# Altium PCB Boost_Shield.PcbDoc
Units mil, origin at the board's own origin, x right, y up, seen from the top; angles counter-clockwise.
Board outline 3000 x 2000 mil, 2 copper layers (Top Layer, Bottom Layer); 29 components, 16 nets, 81 pads, 7 vias.
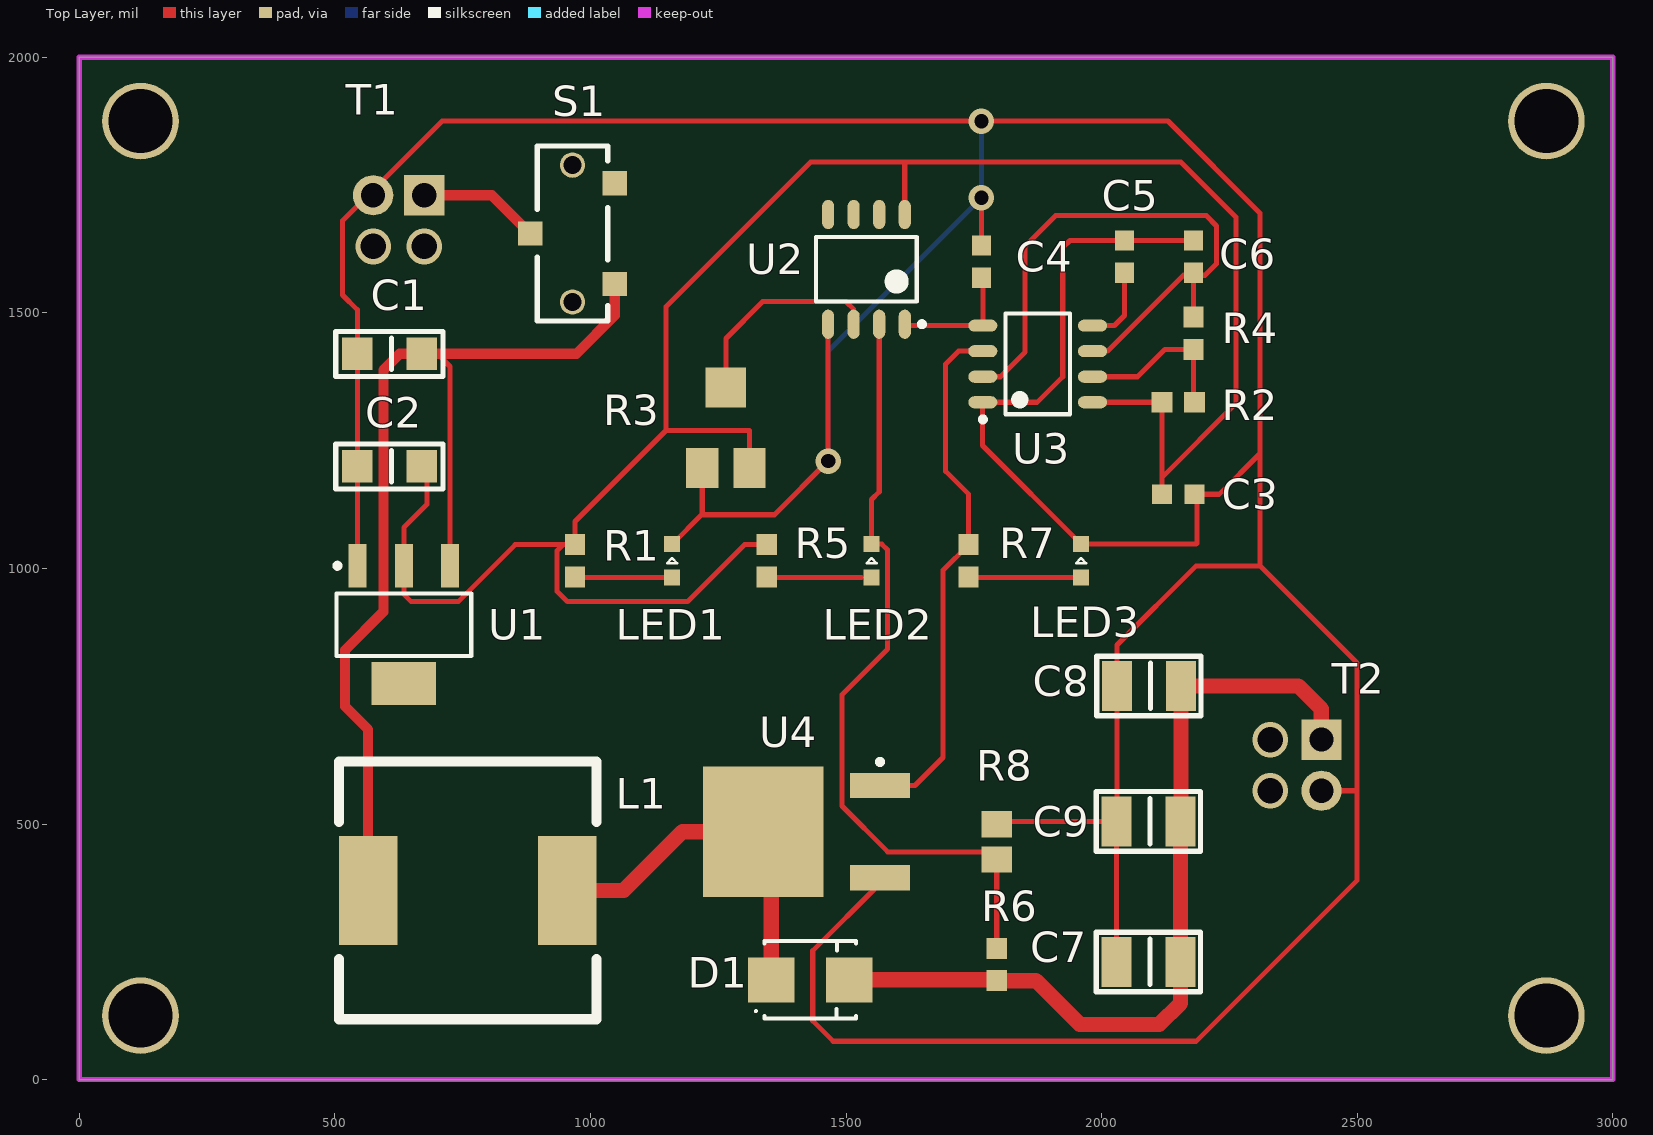
[diagram p0: Top Layer view]
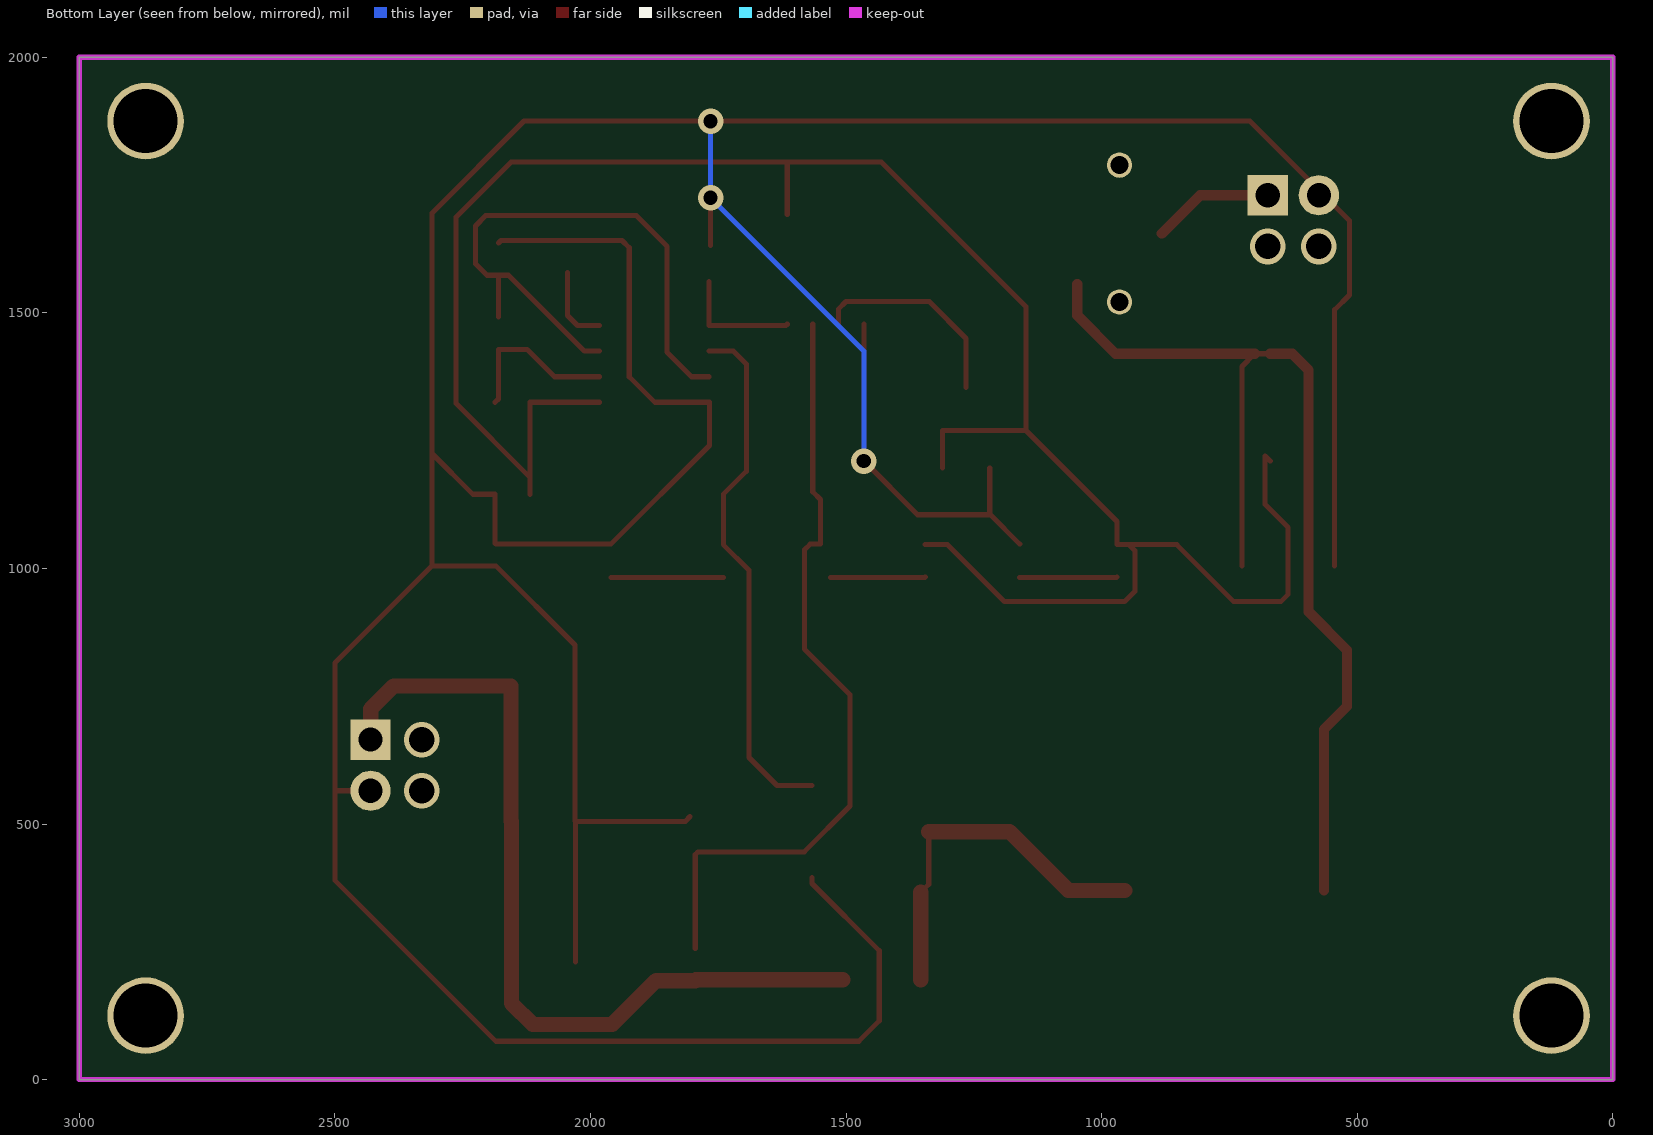
[diagram p1: Bottom Layer view, seen from below]

## Layer stack, top to bottom
Top Solder: solder mask 0.4, Solder Resist, Dk 3.5
Top Layer: signal copper 1.4
Dielectric 1: dielectric 12.6, FR-4, Dk 4.8
Bottom Layer: signal copper 1.4
Bottom Solder: solder mask 0.4, Solder Resist, Dk 3.5

## Board outline
0,0 0,2000 3000,2000 3000,0

## Design rules (kind name [scope] priority, off if disabled: settings)
Clearance [All] p1: gap=10
PolygonConnect [All] p1: connectstyle=Relief reliefconductorwidth=10 reliefentries=4 polygonreliefangle="90 Angle" airgapwidth=10
RoutingVias [All] p1: holewidth=28 width=50 viastyle="Through Hole" minholewidth=28 minwidth=50 maxholewidth=28 maxwidth=50
SolderMaskExpansion [All] p1: expansion=4
Width [All] p1: maxlimit=32 minlimit=10 preferedwidth=10
30 further rules are at their usual default settings.

## Components (designator, comment, footprint, x,y, rotation, side; value= is the part's Value field where it differs from the comment)
C1 "Cap1206" CAP1206 670,1420 r0 top
C2 "Cap1206" CAP1206 670,1200 r0 top
C3 "Cap" CAPC0603 2150,1145 r0 top
C4 "Cap" CAPC0603 1765,1600 r270 top
C5 "Cap" CAPC0603 2045,1610 r90 top
C6 "Cap" CAPC0603 2180,1610 r90 top
C7 "CAP1210" CAP1210 2155,230 r0 top
C8 "CAP1210" CAP1210 2155.98,770 r0 top
C9 "CAP1210" CAP1210 2155,505 r0 top
D1 "STTH212" STTH212 1430,195 r0 top
L1 "744771147" 744771147 760,370 r180 top
LED1 "LED" LED0603 1160,1015 r90 top
LED2 "LED" LED0603 1550,1015 r90 top
LED3 "LED" LED0603 1960,1015 r90 top
R1 "Res" RES0603 970,1015 r270 top
R2 "Res" RES0603 2150,1325 r180 top
R3 "Pot" ST4ETA103 1265,1275 r180 top
R4 "Res" RES0603 2180,1460 r270 top
R5 "Res" RES0603 1345,1015 r270 top
R6 "Res" RES0603 1795,225 r90 top
R7 "Res" RES0603 1740,1015 r270 top
R8 "Res" RES0805 1795,465 r90 top
S1 "SPDT Slide Switch" CL-SB-12B-01T 965,1655 r270 top
T1 "1725656" 1725656#1 675,1730 r270 top
T2 "1725656" 1725656#2 2430,665 r180 top
U1 "LM317" LM317 635,890 r270 top
U2 "LM393" LM393 1540,1585 r90 top
U3 "SE555" SE555 1875,1400 r0 top
U4 "FQD2N100" FQD2N100 1405,485 r180 top

## Footprints (in the part's own frame and the unit in brackets; to place one, negate y for a bottom-side part, rotate by r counter-clockwise, add the part's x,y. Pads: shape width x height; smd on the part's side, far side on the other; paste and mask are expansions set on the pad)
1725656#1 [mm] "CONN TERM BLOCK 2.54MM 2POS"
  rect 2x2 hole 1.2: 1(0,0)
  round 2 hole 1.2: 2(0,-2.54)
1725656#2 [mm] "CONN TERM BLOCK 2.54MM 2POS"
  rect 2x2 hole 1.2: 1(0,0)
  round 2 hole 1.2: 2(0,2.54)
744771147 [mm]
  rect 2.9x5.4 smd: 1(4.95,0) 2(-4.95,0)
  silkscreen extent -6.4,-6.4 6.4,6.4, body extent -6.34,-6.19 6.3,6.45, height 6.5
CAP1206 [mm]
  rect 1.5x1.6 smd: 1(0,0) 2(-3.2,0)
  silkscreen extent -4.27,-1.13 1.06,1.1, body extent -3.2,-0.9 0.02,0.9, height 1.6
CAP1210 [mm]
  rect 1.5x2.5 smd: 1(-0.02,0) 2(-3.2,0)
  silkscreen extent -4.2,-1.48 0.97,1.48, body extent -3.22,-1.26 0,1.25, height 2.5
CAPC0603 [mm] "Chip Capacitor, 2-Leads, Body 1.60x0.80mm, IPC Medium Density"
  rect 1x0.95 smd: 1(-0.8,0) 2(0.8,0)
  body extent -0.88,-0.48 0.87,0.48, height 0.8
CL-SB-12B-01T [mm] "SWITCH SLIDE SPDT 200MA 12V"
  round 1.256 hole 0.9 paste+0 mask+0: 0(-3.4,0) 0(3.4,0)
  rect 1.2x1.2 smd: 1(-2.5,2.1) 2(0,-2.1) 3(2.5,2.1)
  silkscreen extent -4.35,-1.75 4.35,1.75, body extent -4.25,-2.5 4.25,2.5, height 5.5
FQD2N100 [mm] "D-PAK, 3-Pads, Body 6.21x6.73mm (max), IPC Medium Density"
  rect 6x6.5 smd: D(1.7,0)
  rect 3x1.25 smd: G(-4.1,-2.29) S(-4.1,2.29)
  silkscreen extent -4.23,-3.59 -3.98,-3.34, body extent -2.55,-3.37 3.67,3.37, height 2.39
LED0603 [mm] "Chip LED, 2-Leads, Body 1.60x0.80mm, IPC Medium Density"
  rect 0.8x0.8 smd: A(-0.825,0) C(0.825,0)
  silkscreen extent -0.13,-0.25 0.13,0.25, body extent -0.88,-0.47 0.87,0.48, height 0.8
LM317 [mm] "SOT223, 4-Leads, Body 6.50x7.00mm (avg), Pitch 2.30mm, IPC Medium Density"
  rect 2.15x0.9 smd: 1(-2.925,-2.3) 2(-2.925,0) 3(-2.925,2.3)
  rect 2.15x3.2 smd: 4(2.925,0)
  silkscreen extent -3.05,-3.42 1.55,3.35, body extent -1.85,-3.35 1.85,3.35, height 1.8
LM393 [mm] "TSOP, 8-Leads, Body 3.00x2.95mm, Pitch 0.65mm, IPC Medium Density"
  oval 1.45x0.6 smd: 1(-2.725,-1.905) 2(-2.725,-0.635) 3(-2.725,0.635) 4(-2.725,1.905) 5(2.725,1.905) 6(2.725,0.635) 7(2.725,-0.635) 8(2.725,-1.905)
  silkscreen extent -2.85,-2.88 1.6,2.5, body extent -2,-2.5 2,2.5, height 1.75
RES0603 [mm] "Chip Resistor, 2-Leads, Body 1.60x0.80mm, IPC Medium Density"
  rect 1.05x1 smd: 1(-0.8,0) 2(0.8,0)
  body extent -0.88,-0.47 0.87,0.48, height 0.8
RES0805 [mm] "Chip Resistor, 2-Leads, Body 2.01x1.25mm, IPC Medium Density"
  rect 1.3x1.5 smd: 1(-0.875,0) 2(0.875,0)
  body extent -1.1,-0.72 1.11,0.72, height 1.8
SE555 [mm] "SOP, 8-Leads, Body 4.90x3.90mm, Pitch 1.27mm, IPC Medium Density"
  oval 1.45x0.6 smd: 1(-2.725,-1.905) 2(-2.725,-0.635) 3(-2.725,0.635) 4(-2.725,1.905) 5(2.725,1.905) 6(2.725,0.635) 7(2.725,-0.635) 8(2.725,-1.905)
  silkscreen extent -2.85,-2.88 1.6,2.5, body extent -1.91,-2.54 2.09,2.46, height 1.75
ST4ETA103 [mm] "TRIMMER 10K OHM 0.25W SMD"
  rect 1.6x2 smd: 1(-1.175,2) 2(1.175,2)
  rect 2x2 smd: 3(0,-2)
  body extent -2.5,-2.3 2.5,2.3, height 2.3
STTH212 [mm]
  rect 2.3x2.23 smd: A(-1.935,0) C(1.935,0)
  silkscreen extent -2.75,-1.93 2.28,1.93, body extent -2.29,-2 2.29,1.95, height 1

## Part data
C1 C2: "CAP CER 1UF 50V 10% X7R 1206"
C7 C8 C9: "CAP CER 10UF 50V 20% X5R 1210"
D1: "DIODE GEN PURP 1.2KV 2A SMB"
L1: "FIXED IND 47UH 2.21A 75 MOHM SMD"
R3: library part Potentiometer, "Potentiometer"
T1 T2: "CONN TERM BLOCK 2.54MM 2POS"
U1: "IC REG LDO ADJ 1.5A SOT223"
U2: "IC VOLT COMPARATOR DUAL 8MISOIC"
U3: "IC OSC SGL TIMER 100KHZ 8SOIC"
U4: "MOSFET N-CH 1000V 1.6A DPAK"

## Free pads (board coordinates)
  round 150 hole 125: 0(120,125) 0(120,1875) 0(2870,125) 0(2870,1875)

## Via types
v1: diameter 70, hole 50, Top Layer to Bottom Layer, 4 vias
v2: diameter 50, hole 28, Top Layer to Bottom Layer, 3 vias

## Nets (pads, with @x,y where several pads share a name; then routed paths per layer and width w, separated by ;. In a path a pad name is that pad's centre, name@x,y a point inside that pad or via, vN(x,y) a via of type N, cw(c..) or ccw(c..) an arc to the next point about the centre after c; other vN are vias at no path point)
FEEDBACK: LED2.C R6.2 R8.1 U2.2 | length 1536.2
  Top Layer w10: U2.2 1565,1150 1550,1135 LED2.C 1570,1047.48 1581,1036.48 1581,842 1492,753 1492,535 1581.45,445.55 1789.45,445.55 1795,440 R6.2
GND: C1.2 C2.2 C3.2 C4.1 C5.2 C6.2 C7.2 C8.2 C9.2 LED1.C LED3.C R3.2 R8.2 T1.2 T2.2 U1.1 U2.4 U3.1 U4.S | length 10002.9
  Top Layer w10: U1.1 544.45,1107.57 544.02,1108 544.02,1210 C1.2 544.02,1505.98 515,1535 515,1680 565,1730 710,1875 v2(1765,1875) 2130,1875 2310,1695 2310,1005 ; LED1.C 1218.74,1106.22 R3.2 ; 1218.74,1105 1360,1105 v2(1465,1210) U2.4 ; U4.S 1566.42,383.42 1435,252 1435,115 1475,75 2185,75 2500,390 2500,565 ; C4.1 v2(1765,1725) ; R8.2@1805,514.45 1814.45,505 C9.2 ; C7.2 C9.2 ; C6.2@2180,1636.5 2175,1641.5 C5.2 1938,1641.5 1924,1627.5 1924,1375 1874,1325 U3.1 1767,1325 1767,1240.48 LED3.C 2184.98,1047.48 2186.5,1049 2186.5,1145 2230,1145 2310,1225 ; 2330,985 2310,1005 ; T2.2 2500,565 ; C9.2 2030,505.98 C8.2 2030,850 2185,1005 2310,1005 ; 2310,1005 2500,815 2500,565
  Bottom Layer w10: v2(1465,1210) 1465,1425 v2(1765,1725) v2(1765,1875)
NetC5_1: C5.1 U3.5 | length 154.5
  Top Layer w10: U3.5 2025,1475 2045,1495 C5.1
NetC7_1: C7.1 C8.1 C9.1 D1.C R6.1 T2.1 | length 1671
  Top Layer w10: R6.1@1793.5,195 R6.1 ; C9.1 C9.1@2155.2,505.98
  Top Layer w30: D1.C R6.1@1793.5,195 ; R6.1 1871.5,193.5 1957.29,107.71 2112.71,107.71 2154.21,149.21 C7.1 C9.1 ; C9.1@2155.2,505.98 C8.1 2385,770 2430,725 T2.1@2430,670
NetD1_A: D1.A L1.2 U4.D | length 727.3
  Top Layer w10: U4.D 1338.07,381.93 U4.D@1353.82,366.18
  Top Layer w30: L1.2 1065,370 1180,485 U4.D ; D1.A U4.D@1353.82,366.18
NetLED1_A: LED1.A R1.2 | length 190.4
  Top Layer w10: R1.2 970.98,982.52 LED1.A
NetLED2_A: LED2.A R5.2 | length 185.4
  Top Layer w10: R5.2 1345.98,982.52 1530,982.52
NetLED3_A: LED3.A R7.2 | length 220
  Top Layer w10: R7.2@1740,982.52 LED3.A
NetR2_1: R2.1 R4.2 U3.7 | length 326.1
  Top Layer w10: U3.7 2070.5,1375 2124,1428.5 R4.2 2180,1331.5 R2.1@2186.5,1325
NetR3_3: R3.3 U2.3 | length 411.6
  Top Layer w10: R3.3 1265,1450 1337,1522 1500,1522 1515,1507 U2.3
NetS1_2: S1.2 T1.1 | length 248.4
  Top Layer w20: T1.1@665,1730 807.32,1730 S1.2
"REG 12V": C2.1 C3.1 R1.1 R2.2 R3.1 R5.1 U1.2 U2.8 U3.8 | length 4325.2
  Top Layer w10: C2.1@670,1210 680,1220 680,1125 635,1080 U1.2 635,949.5 649.5,935 741.5,935 853,1046.5 946.5,1046.5 ; R3.1 1311.26,1270 1148,1270 ; R5.1 1301.5,1046.5 1190,935 955,935 935,955 935,1035 946.5,1046.5 ; U2.8 1615,1795 ; U3.8 R2.2 C3.1 2118.5,1178.5 2263,1323 2263,1687 2155,1795 1615,1795 ; 946.5,1046.5 R1.1 970,1092 1148,1270 ; 1148,1270 1148,1512 1431,1795 1615,1795
RESET: C4.2 U2.1 U3.4 | length 239.6
  Top Layer w10: U2.1 1617.72,1475 U3.4 C4.2@1767.72,1560.79
SWITCHING: R7.1 U3.3 U4.G | length 1038.6
  Top Layer w10: U4.G 1635,575.16 1690,630.16 1690,996.5 R7.1 1740,1145 1695,1190 1695,1400 1720,1425 U3.3
TRIGGER: C6.1 R4.1 U3.2 U3.6 | length 1186.9
  Top Layer w10: U3.2 1802,1375 1850,1423 1850,1630 1910,1690 2205,1690 2225,1670 2225,1596 2202.5,1573.5 C6.1@2180,1573.5 ; U3.6 2011.5,1425 2160,1573.5 C6.1@2180,1573.5 ; R4.1 C6.1@2180,1573.5
VIN: C1.1 L1.1 S1.3 U1.3 | length 2051.5
  Top Layer w10: C1.1 700.55,1420 725.55,1395 U1.3
  Top Layer w20: L1.1 565.12,684.88 520,730 520,840 595,915 595,1388 627,1420 C1.1 ; 700.55,1420 972.68,1420 1047.68,1495 S1.3
pads on no net: S1.0 S1.1 U1.4 U2.5 U2.6 U2.7
copper on no net:
  other v1: 2330,565 2330,665 575,1630 675,1630

## Keep-outs
Keep-Out Layer:
  the board outline again, w10